# Altium PCB altium-nano-debug.PcbDoc
Units mm, origin at the board's own origin, x right, y up, seen from the top; angles counter-clockwise.
Board outline 39.64 x 60.08 mm, 2 copper layers (Top Layer, Bottom Layer), stack 1.505 mm thick; 53 components, 50 nets, 209 pads, 56 vias.
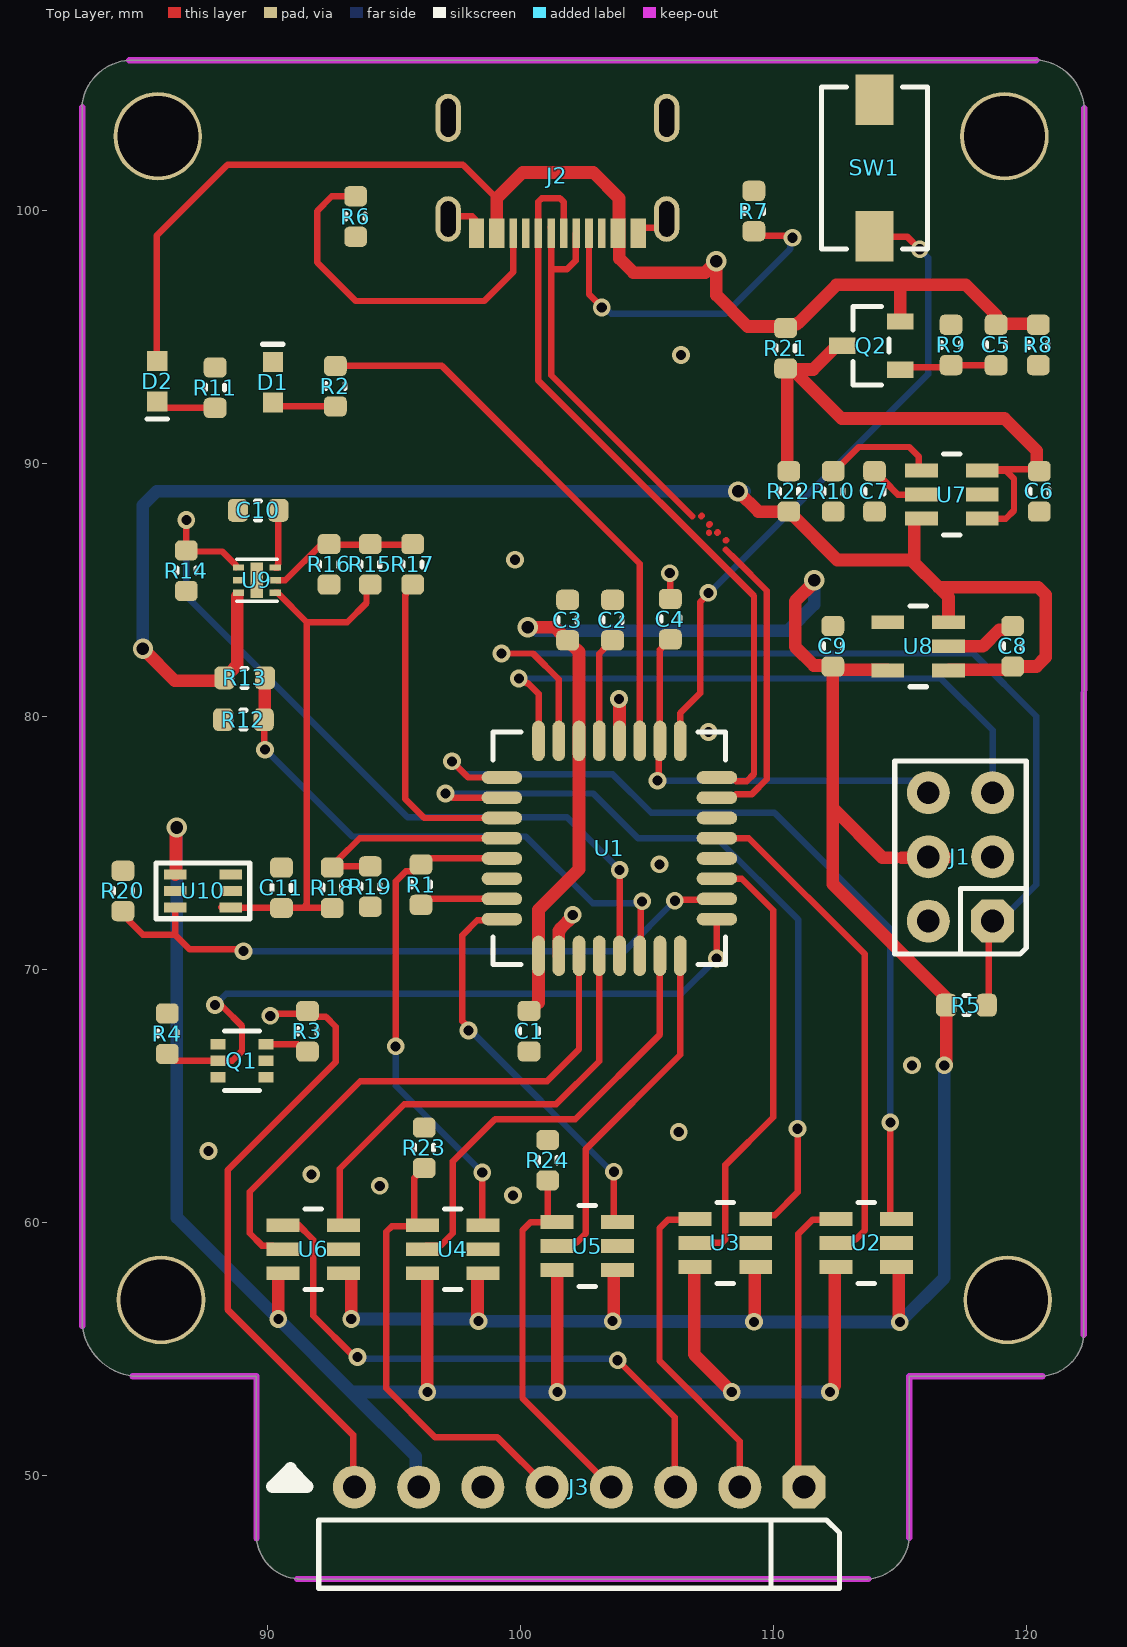
[diagram p0: Top Layer view]
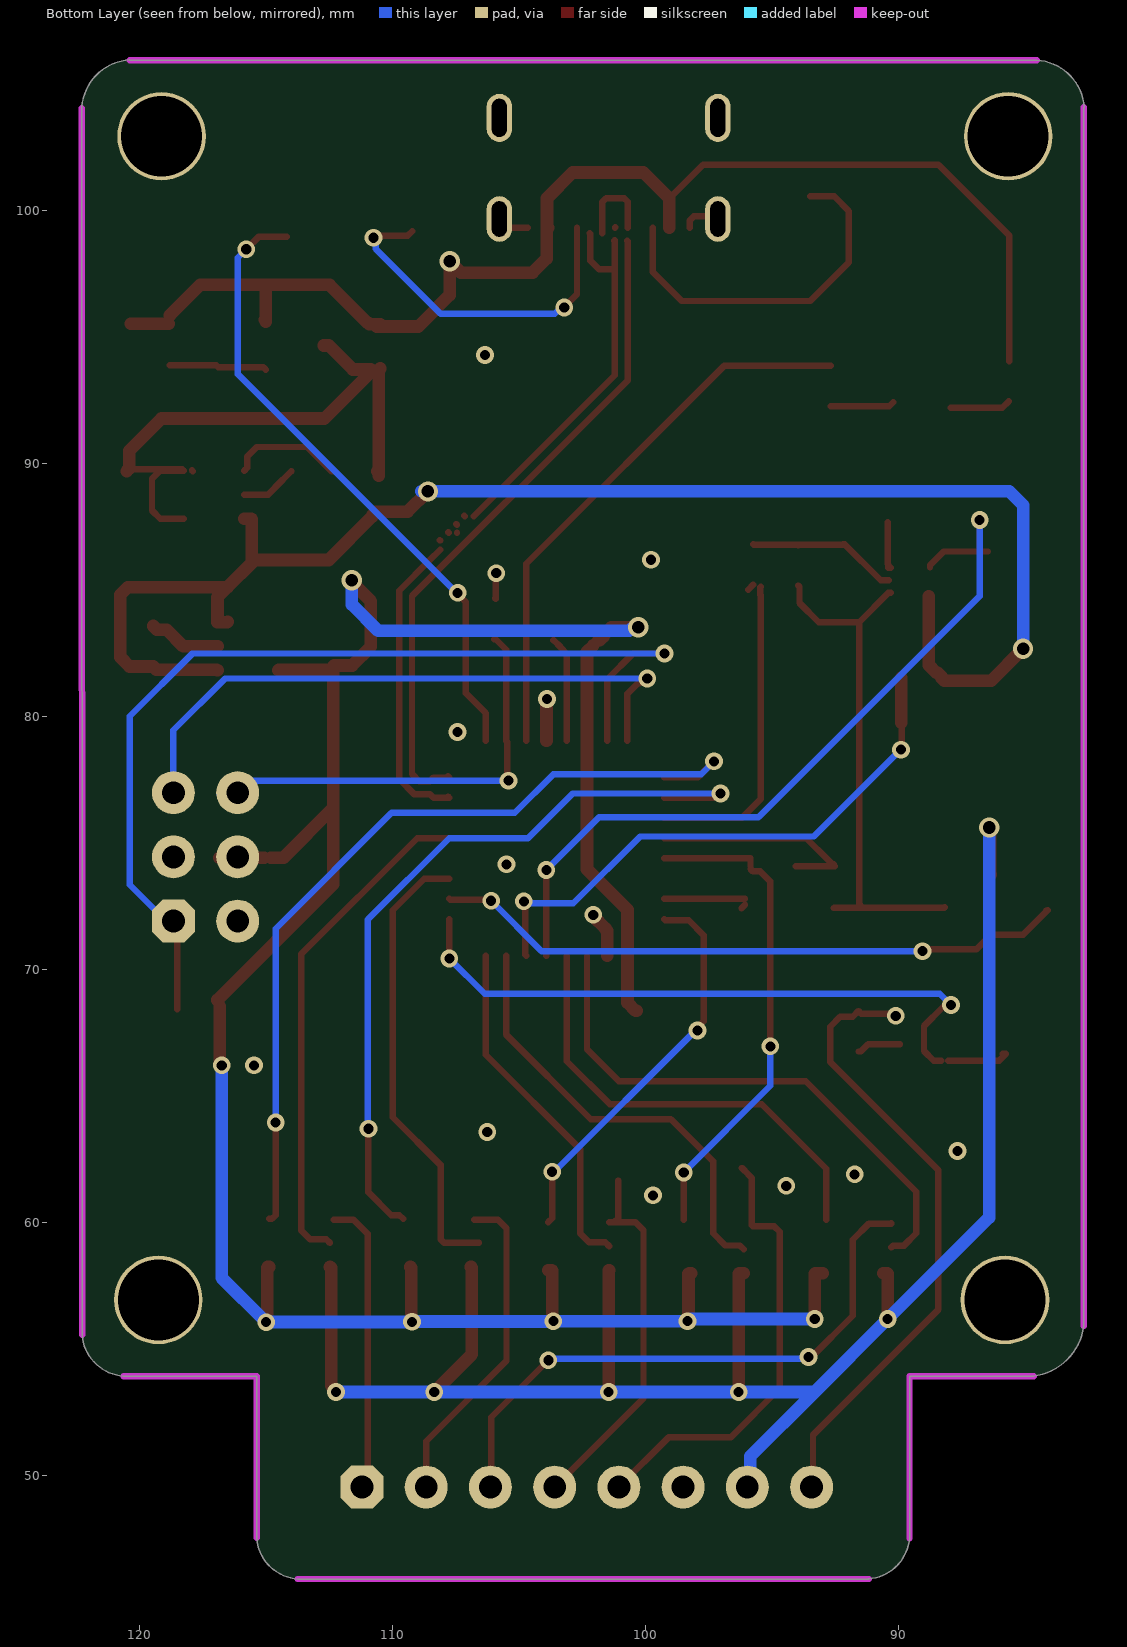
[diagram p1: Bottom Layer view, seen from below]

## Layer stack, top to bottom
Top Solder: solder mask 0.0102, Solder Resist, Dk 3.5
Top Layer: signal copper 0.0356
Dielectric 1: prepreg 0.1168, PP-016, Dk 4.4
Dielectric 2: dielectric 1.2, FR-4, Dk 4.8
Dielectric 3: prepreg 0.1168, PP-016, Dk 4.4
Bottom Layer: signal copper 0.0356
Bottom Solder: solder mask 0.0102, Solder Resist, Dk 3.5

## Board outline
84.645,53.922 89.55,53.922 89.55,47.512 ccw(c91.291,47.652) 91.167,45.909 91.166,45.896 113.738,45.896 ccw(c113.612,47.652) 115.368,47.527 115.368,53.922 120.635,53.922 ccw(c120.509,55.678) 122.265,55.552 122.265,59.314 122.281,102.703 122.281,104.066 122.284,103.957 ccw(c120.259,103.957) 120.385,105.978 120.384,105.963 84.52,105.963 ccw(c84.645,103.957) 82.64,104.108 82.663,104.106 82.663,102.703 82.663,59.055 82.663,55.904 ccw(c84.917,56.182)

## Components (designator, comment, footprint, x,y, rotation, side; value= is the part's Value field where it differs from the comment)
C1 "" CAP_C_0603 100.33,67.564 r90 top
C2 "" CAP_C_0603 103.632,83.82 r270 top
C3 "" CAP_C_0603 101.854,83.82 r270 top
C4 "" CAP_C_0603 105.918,83.858 r270 top
C5 "" CAP_C_0603 118.797,94.701 r270 top
C6 "" CAP_C_0603 120.509,88.909 r270 top
C7 "" CAP_C_0603 113.989,88.909 r270 top
C8 "" CAP_C_0603 119.456,82.783 r90 top
C9 "" CAP_C_0603 112.344,82.783 r90 top
C10 "" CAP_C_0603 89.613,88.156 r180 top
C11 "" CAP_C_0603 90.539,73.234 r90 top
D1 "" LED_0603_Yellow 90.198,93.229 r90 top
D2 "" LED_0603_GREEN 85.626,93.267 r270 top
J1 "" HDR_M_2.54_2x3 117.39,74.456 r90 top
J2 "" CON_USB2.0-C_RCPT_SMD_RA_KLS_KLS1-5409 101.449,102.326 r180 top
J3 "" HDR_F_2.54_1x8_RA 102.313,49.533 r180 top
Q1 "" SOT-363 88.976,66.396 r0 top
Q2 "" SOT-23-3 113.863,94.677 r90 top
R1 "" RES_C_0603 96.056,73.359 r270 top
R2 "" RES_C_0603 92.671,93.071 r90 top
R3 "" RES_C_0603 91.567,67.558 r90 top
R4 "" RES_C_0603 86.024,67.465 r270 top
R5 "" RES_C_0603 117.625,68.594 r180 top
R6 "" RES_C_0603 93.472,99.779 r270 top
R7 "" RES_C_0603 109.22,99.995 r90 top
R8 "" RES_C_0603 120.467,94.701 r90 top
R9 "" RES_C_0603 117.019,94.701 r270 top
R10 "" RES_C_0603 112.358,88.909 r90 top
R11 "" RES_C_0603 87.912,93.013 r270 top
R12 "" RES_C_0603 89.034,79.88 r0 top
R13 "" RES_C_0603 89.083,81.532 r180 top
R14 "" RES_C_0603 86.777,85.774 r90 top
R15 "" RES_C_0603 94.05,86.024 r270 top
R16 "" RES_C_0603 92.42,86.024 r90 top
R17 "" RES_C_0603 95.725,86.024 r270 top
R18 "" RES_C_0603 92.545,73.234 r270 top
R19 "" RES_C_0603 94.05,73.281 r90 top
R20 "" RES_C_0603 84.269,73.108 r270 top
R21 "" RES_C_0603 110.474,94.572 r90 top
R22 "" RES_C_0603 110.603,88.909 r90 top
R23 "" RES_C_0603 96.182,62.951 r270 top
R24 "" RES_C_0603 101.067,62.459 r270 top
SW1 "" SW_TACT_SMD_CK_KSR231GLFS 113.989,101.699 r0 top
U1 "" TQFP-32_7x7 103.505,74.794 r0 top locked
U2 "" SOT-23-6 113.666,59.189 r90 top
U3 "" SOT-23-6 108.095,59.189 r90 top
U4 "" SOT-23-6 97.31,58.938 r90 top
U5 "" SOT-23-6 102.631,59.063 r90 top
U6 "" SOT-23-6 91.793,58.938 r90 top
U7 "" SOT-23-6 117.052,88.783 r90 top
U8 "" SOT-23-5 115.716,82.783 r90 top
U9 "" "MLF-6 1.6X1.6mm" 89.563,85.396 r0 top
U10 "" SC-70-6 87.432,73.108 r0 top

## Footprints (in the part's own frame and the unit in brackets; to place one, negate y for a bottom-side part, rotate by r counter-clockwise, add the part's x,y. Pads: shape width x height; smd on the part's side, far side on the other; paste and mask are expansions set on the pad)
CAP_C_0603 [mm] "Chip Capacitor, 2-Leads, Body 1.6x0.8mm, IPC Medium Density"
  rrect50% 0.8x0.9 smd: 1(-0.8,0) 2(0.8,0)
  silkscreen extent -0.1,-0.38 0.1,0.38
CON_USB2.0-C_RCPT_SMD_RA_KLS_KLS1-5409 [mm]
  rrect50% 1x1.9 on Top Paste: 0(-4.32,-1.355) 0(4.32,-1.355)
  rrect50% 1x1.8 on Top Paste: 0(-4.32,2.645) 0(4.32,2.645)
  oval 1x1.8 hole 0.6 slot 1.4 at 90 deg: 1(-4.32,2.645) 2(4.32,2.645)
  oval 1x1.9 hole 0.6 slot 1.5 at 90 deg: 3(-4.32,-1.355) 4(4.32,-1.355)
  rect 0.6x1.15 smd: A1/B12(-3.2,3.21) A4/B9(-2.4,3.21) B1/A12(3.2,3.21) B4/A9(2.4,3.21)
  rect 0.3x1.15 smd: A5(-1.25,3.21) A6(-0.25,3.21) A7(0.25,3.21) A8(1.25,3.21) B5(1.75,3.21) B6(0.75,3.21) B7(-0.75,3.21) B8(-1.75,3.21)
HDR_F_2.54_1x8_RA [mm] "Header Female Right Angle 8 Way 2.54mm Pitch"
  oct 1.7x1.7 hole 0.9: 1(-8.89,0)
  round 1.7 hole 0.9: 2(-6.35,0) 3(-3.81,0) 4(-1.27,0) 5(1.27,0) 6(3.81,0) 7(6.35,0) 8(8.89,0)
  silkscreen extent -10.29,1.3 10.3,4
HDR_M_2.54_2x3 [mm] "Header Male Vertical 2x3 Way 2.54mm Pitch"
  oct 1.7x1.7 hole 0.9: 1(-2.54,-1.27)
  round 1.7 hole 0.9: 2(-2.54,1.27) 3(0,-1.27) 4(0,1.27) 5(2.54,-1.27) 6(2.54,1.27)
  silkscreen extent -3.84,-2.6 3.8,2.6
LED_0603_GREEN [mm] "LED chip 0603"
  rect 0.8x0.8 smd: 1(-0.8,0) 2(0.8,0)
  silkscreen extent 1.5,-0.4 1.5,0.4
LED_0603_Yellow [mm] "LED chip 0603"
  rect 0.8x0.8 smd: 1(-0.8,0) 2(0.8,0)
  silkscreen extent 1.5,-0.4 1.5,0.4
"MLF-6 1.6X1.6mm" [mm]
  rect 0.45x0.25 smd paste-0.042 mask+0.045: 1(-0.725,0.5) 2(-0.725,0) 3(-0.725,-0.5) 4(0.725,-0.5) 5(0.725,0) 6(0.725,0.5)
  rect 0.5x1.4 smd: 7(0,0)
  silkscreen extent -0.8,-0.82 0.8,0.82
RES_C_0603 [mm] "Chip Resistor, 2-Leads, Body 1.6x0.8mm, IPC Medium Density"
  rrect50% 0.8x0.9 smd: 1(-0.8,0) 2(0.8,0)
  silkscreen extent -0.1,-0.38 0.1,0.38
SC-70-6 [mm]
  rect 0.9x0.4 smd: 1(-1.1,0.65) 2(-1.1,0) 3(-1.1,-0.65) 4(1.1,-0.65) 5(1.1,0) 6(1.1,0.65)
  silkscreen extent -1.85,-1.1 1.85,1.1
SOT-23-3 [mm]
  rect 0.65x1.05 smd: 1(-0.95,-1.15) 2(0.95,-1.15) 3(0,1.15)
  silkscreen extent -1.55,-0.7 1.55,0.72
SOT-23-5 [mm] "SOT-23-5"
  rect 0.55x1.3 smd: 1(-0.95,-1.2) 2(0,-1.2) 3(0.95,-1.2) 4(0.95,1.2) 5(-0.95,1.2)
  silkscreen extent -1.6,-0.33 1.6,0.33
SOT-23-6 [mm] "SOT-23-6"
  rect 0.55x1.3 smd: 1(-0.95,-1.2) 2(0,-1.2) 3(0.95,-1.2) 4(0.95,1.2) 5(0,1.2) 6(-0.95,1.2)
  silkscreen extent -1.6,-0.33 1.6,0.33
SOT-363 [mm]
  rect 0.6x0.42 smd mask+0.065: 1(-0.95,0.65) 2(-0.95,0) 3(-0.95,-0.65) 4(0.95,-0.65) 5(0.95,0) 6(0.95,0.65)
  silkscreen extent -0.69,-1.17 0.69,1.17
SW_TACT_SMD_CK_KSR231GLFS [mm]
  rect 1.5x2 smd: 1(0,-2.7) 2(0,2.7)
  silkscreen extent -2.1,-3.2 2.1,3.2
TQFP-32_7x7 [mm] "TQFP, 32-Leads, Body 7x7mm, Pitch 0.80mm Height 1mm"
  oval 1.6x0.5 smd: 1(-4.25,2.8) 2(-4.25,2) 3(-4.25,1.2) 4(-4.25,0.4) 5(-4.25,-0.4) 6(-4.25,-1.2) 7(-4.25,-2) 8(-4.25,-2.8) 17(4.25,-2.8) 18(4.25,-2) 19(4.25,-1.2) 20(4.25,-0.4) 21(4.25,0.4) 22(4.25,1.2) 23(4.25,2) 24(4.25,2.8)
  oval 0.5x1.6 smd: 9(-2.8,-4.25) 10(-2,-4.25) 11(-1.2,-4.25) 12(-0.4,-4.25) 13(0.4,-4.25) 14(1.2,-4.25) 15(2,-4.25) 16(2.8,-4.25) 25(2.8,4.25) 26(2,4.25) 27(1.2,4.25) 28(0.4,4.25) 29(-0.4,4.25) 30(-1.2,4.25) 31(-2,4.25) 32(-2.8,4.25)
  silkscreen extent -4.6,-4.6 4.6,4.6

## Part data
C1 C2 C3 C4 C5 C6 C7 C8 C9 C10 C11: library part CAP0455
D1: library part LED0049, "LED"
D2: library part DIODE1815, "LED"
J1: library part CON0039
J2: library part CON2580
J3: library part CON1288, "Header 1x8"
Q1: library part TRA1406, "ADC"
Q2: library part TRA0048, "Transistor MOS"
R1 R2 R3 R4 R5 R6 R7 R8 R9 R10 R11 R12 R13 R14 R15 R16 R17 R18 R19 R20 R21 R22 R23 R24: library part RES0193, "Resistor"
SW1: library part SWITCH1050, "Switch"
U1: library part IC2982, "Microcontroller"
U2 U3 U4 U5 U6: library part IC2143
U7: library part TRA1439
U8: library part MIC9419
U9: library part MIC7389, "LDO Regulator"
U10: library part MIC8764

## Free pads (board coordinates)
  round 3.5 hole 3.2: 9(85.648,102.953) 9(85.774,56.932) 9(119.13,102.953) 9(119.255,56.932)

## Via types
v1: diameter 0.7, hole 0.4, Top Layer to Bottom Layer, tented both sides, 50 vias
v2: diameter 0.8, hole 0.5, Top Layer to Bottom Layer, tented both sides, 6 vias

## Nets (pads, with @x,y where several pads share a name; then routed paths per layer and width w, separated by ;. In a path a pad name is that pad's centre, name@x,y a point inside that pad or via, vN(x,y) a via of type N, cw(c..) or ccw(c..) an arc to the next point about the centre after c; other vN are vias at no path point)
CDC_RX: J3.2 U3.4 | length 13.5
  Top Layer w0.254: U3.4@106.756,60.111 105.831,60.111 105.486,59.766 105.486,54.524 108.663,51.347 J3.2@108.663,49.031
CDC_RX_CTRL: U1.19 U3.5 | length 18.1
  Top Layer w0.254: U3.5@106.574,59.189 107.946,59.189 108.095,59.338 108.095,62.273 109.982,64.16 109.982,72.35 108.738,73.594 U1.19
CDC_TX: J3.1 U2.4 | length 12.2
  Top Layer w0.254: J3.1@111.203,49.031 110.979,49.255 110.979,59.544 111.546,60.111 U2.4@112.311,60.111
CDC_TX_CTRL: U1.21 U2.5 | length 20
  Top Layer w0.254: U1.21 109.019,75.194 113.612,70.6 113.612,59.69 113.259,59.337 112.614,59.337 U2.5
DAC: R17.2 U1.3 | length 12.8
  Top Layer w0.254: R17.2@95.429,85.133 95.447,85.116 95.447,84.82 95.429,84.803 95.429,76.745 96.18,75.994 U1.3 ; R17.2 R17.2@95.931,85.018
DBG0: J3.5 R23.2 U4.4 | length 17.8
  Top Layer w0.254: R23.2 96.171,62.151 95.904,61.883 95.904,61.873 95.788,61.757 95.788,59.888 95.754,59.854 94.906,59.854 94.677,59.625 94.677,53.435 96.615,51.497 99.079,51.497 J3.5
DBG0_CTRL: U1.15 U4.5 | length 17.7
  Top Layer w0.254: U4.5 96.258,59.086 96.831,59.086 97.31,59.565 97.31,62.411 98.984,64.084 102.159,64.084 105.505,67.43 U1.15
DBG1: J3.4 R24.2 U5.4 | length 14.7
  Top Layer w0.254: R24.2 101.067,60.161 101.215,60.013 U5.4 ; U5.4@101.141,60.013 100.392,60.013 100.069,59.69 100.069,53.047 J3.4
DBG1_CTRL: U1.16 U5.5 | length 13.9
  Top Layer w0.254: U5.5 101.579,59.211 102.224,59.211 102.577,59.565 102.577,62.902 106.305,66.63 U1.16
DBG2: J3.3 U6.4 | length 24
  Top Layer w0.254: U6.4@90.271,59.96 90.277,59.954 91.153,59.954 91.793,59.314 91.793,56.309 93.428,54.674 v1(93.548,54.674) ; v1(103.831,54.549) 106.088,52.292 J3.3@106.088,49.031
  Bottom Layer w0.254: v1(93.548,54.674) 93.611,54.612 103.768,54.612 v1(103.831,54.549)
DBG2_CTRL: U1.11 U6.5 | length 21.9
  Top Layer w0.254: U6.5@90.271,59.01 90.196,59.085 89.765,59.085 89.285,59.565 89.285,61.218 93.65,65.583 101.041,65.583 102.305,66.847 U1.11
DBG2_GPIO: U1.12 U6.3 | length 18.2
  Top Layer w0.254: U6.3@92.845,60.111 92.845,62.122 95.391,64.668 101.397,64.668 103.105,66.377 U1.12
DBG3: J3.8 R3.2 | length 25.5
  Top Layer w0.254: v1(90.094,68.167) 90.179,68.253 91.462,68.253 R3.2 91.795,68.13 92.297,68.13 92.685,67.742 92.685,66.345 88.407,62.067 88.407,56.555 93.368,51.594 J3.8@93.368,48.961
DBG3_CTRL: Q1.2 R4.2 U1.17 | length 27.9
  Top Layer w0.254: R4.2@85.738,66.665 86.007,66.396 Q1.2 ; R4.2@85.774,66.665 R4.2@85.863,66.665 ; v1(87.905,68.594) 87.991,68.508 88.235,68.508 88.976,67.767 88.976,66.78 88.591,66.396 Q1.2@88.301,66.396 ; v1(107.747,70.434) 107.747,71.986 U1.17
  Bottom Layer w0.254: v1(87.905,68.594) 88.349,69.037 106.35,69.037 v1(107.747,70.434)
GND: C1.1 C2.1 C3.1 C4.1 C6.2 C7.2 C8.2 C9.2 C10.2 C11.2 D1.2 J1.2 J2.1 J2.2 J2.3 J2.4 J2.A1/B12 J2.B1/A12 J3.6 pad.9 Q1.1 R4.1 R6.2 R7.2 R8.1 R9.1 R10.1 R11.1 R12.1 R14.1 R16.1 R19.1 R20.1 R23.1 R24.1 SW1.2 U1.10 U1.28 U2.2 U3.2 U4.2 U5.2 U6.2 U7.2 U8.2 U9.2 U9.7 U10.2 U10.5 | length 10.4
  Top Layer w0.254: J2.2@97.128,99.905 97.245,99.788 98.075,99.788 98.248,99.615 J2.B1/A12@98.248,99.34 ; J2.A1/B12@104.648,99.34 105.401,99.34 105.768,99.707 J2.1@105.768,99.905 ; v1(105.893,85.674) 105.905,85.661 105.905,84.671 C4.1 C4.1@105.943,84.683
  Top Layer w0.5: U1.10 101.505,71.534 101.574,71.603 101.574,71.624 102.057,72.107 v1(102.057,72.161) ; v1(103.886,80.696) 103.905,80.677 U1.28 ; U8.2 118.271,82.783 118.921,83.433 119.306,83.433 C8.2
  other v1: 99.691,61.07 94.425,61.446 91.719,61.9 87.655,62.825 106.248,63.576 115.471,66.211 105.489,74.159 107.428,79.394 99.771,86.208 106.339,94.301
ID_SYS: U1.22
NetC2_2: C2.2 U1.29 | length 4.2
  Top Layer w0.254: U1.29 103.105,82.493 103.354,82.742 103.354,82.753 103.622,83.02 C2.2
NetC5_2: C5.2 Q2.1 R9.2 | length 3.9
  Top Layer w0.254: Q2.1 115.1,93.814 116.882,93.814 116.969,93.901 R9.2 C5.2
NetC7_1: C7.1 U7.5 | length 2.3
  Top Layer w0.254: C7.1 113.999,89.709 114.626,89.082 114.626,89.071 114.914,88.783 U7.5
NetC10_1: C10.1 U9.6 | length 1.9
  Top Layer w0.254: U9.6 90.384,85.896 90.386,85.898 90.386,86.017 90.413,86.045 90.413,87.681
NetC11_1: C11.1 R15.2 R18.2 U9.4 U10.4 | length 20.9
  Top Layer w0.254: U10.4@88.156,72.458 88.169,72.446 91.393,72.446 ; U9.4 90.384,84.896 91.542,83.738 ; R18.2 92.533,72.446 91.393,72.446 ; R15.2@93.947,85.186 93.9,85.139 93.9,84.495 93.143,83.738 91.542,83.738 ; 91.393,72.446 91.542,72.595 91.542,83.738
NetD1_1: D1.1 R2.1 | length 2.5
  Top Layer w0.254: D1.1 90.357,92.271 R2.1
NetD2_2: D2.2 R11.2 | length 2.4
  Top Layer w0.254: D2.2 85.88,92.213 R11.2
NetJ2_A5: J2.A5 R7.1 | length 14.1
  Top Layer w0.254: J2.A5@102.698,99.34 102.698,96.709 103.204,96.203 v1(103.204,96.182) ; R7.1 109.389,99.027 110.659,99.027 v1(110.744,98.941)
  Bottom Layer w0.254: v1@103.21,96.187 103.32,96.187 103.576,95.931 108.095,95.931 110.662,98.498 110.662,98.93 v1@110.673,98.941
NetJ2_B5: J2.B5 R6.1 | length 14.4
  Top Layer w0.254: R6.1 92.532,100.579 91.948,99.995 91.948,97.963 93.472,96.439 98.552,96.439 99.698,97.585 J2.B5@99.698,99.34
NetQ1_6: Q1.6 R3.1 | length 1.8
  Top Layer w0.254: Q1.6 91.189,67.046 91.477,66.758 R3.1
NetR1_2: R1.2 U1.7 | length 3.4
  Top Layer w0.254: R1.2 R1.2@96.193,72.422 ; R1.2@96.056,72.794 U1.7
NetR2_2: R2.2 U1.27 | length 22.3
  Top Layer w0.254: R2.2 96.883,93.871 104.705,86.049 U1.27
NetR10_2: R10.2 U7.4 | length 4.5
  Top Layer w0.254: R10.2 112.408,89.709 113.364,90.664 115.368,90.664 115.744,90.288 115.744,89.841 U7.4
NetR15_1: R15.1 R16.2 R17.1 U9.5 | length 6
  Top Layer w0.254: U9.5@90.363,85.396 90.69,85.396 92.119,86.824 92.169,86.824 92.188,86.805 93.928,86.805 93.947,86.786 93.966,86.805 95.706,86.805 R17.1
NetSW1_1: SW1.1 U1.25 | length 25.5
  Top Layer w0.254: U1.25 106.305,80.143 107.092,80.93 107.092,84.524 107.418,84.85 v1(107.418,84.896) ; SW1.1@114.178,98.986 115.278,98.986 v1(115.778,98.486)
  Bottom Layer w0.254: v1(107.418,84.896) 107.468,84.896 116.12,93.548 116.12,98.143 v1(115.778,98.486)
REG_ENABLE: R14.2 U1.13 U9.1 | length 31.8
  Top Layer w0.254: R14.2@86.452,86.532 86.777,86.532 88.201,86.532 88.74,85.994 U9.1@88.74,85.898 ; R14.2 v1(86.777,87.78) ; U1.13 103.908,70.547 103.908,73.936 v1(103.911,73.939)
  Bottom Layer w0.254: v1(86.777,87.78) 86.777,84.77 95.525,76.022 101.829,76.022 v1(103.911,73.939)
S0_0_RX: R1.1 U1.5 U4.3 | length 19.5
  Top Layer w0.254: v1(95.053,66.964) 95.053,73.484 95.448,73.879 95.739,73.879 R1.1@95.838,73.978 ; R1.1@95.838,74.103 95.838,74.395 U1.5 ; U4.3@98.476,60.107 v1(98.476,61.976)
  Bottom Layer w0.254: v1(95.053,66.964) 95.053,65.399 v1(98.476,61.976)
S0_3_CLK: U1.8 U5.3 | length 15.8
  Top Layer w0.254: v1(97.937,67.591) 97.937,67.711 97.694,67.954 97.694,71.36 98.281,71.947 99.208,71.947 U1.8 ; v1(103.683,62.001) 103.683,60.161 U5.3
  Bottom Layer w0.254: v1(97.937,67.591) 98.015,67.591 103.605,62.001 v1(103.683,62.001)
S1_0_TX: U1.1 U2.3 | length 34
  Top Layer w0.254: v1(97.282,78.232) 97.92,77.594 U1.1 ; v1(114.616,63.954) 114.616,60.287 114.764,60.139 U2.3
  Bottom Layer w0.254: v1(97.282,78.232) 97.79,77.724 103.632,77.724 105.156,76.2 110.033,76.2 114.616,71.617 v1(114.616,63.954)
S1_1_RX: U1.2 U3.3 | length 30.9
  Top Layer w0.254: v1(97.028,76.962) 97.149,76.962 97.317,76.794 U1.2 ; U3.3@109.577,60.139 109.725,60.287 110.045,60.287 110.947,61.189 v1(110.947,63.703)
  Bottom Layer w0.254: v1(97.028,76.962) 102.87,76.962 104.638,75.194 107.755,75.194 110.973,71.976 110.973,63.729 v1(110.947,63.703)
SRST: C4.2 J1.6 U1.26 | length 17.5
  Top Layer w0.254: v1(105.41,77.47) 105.458,77.518 105.458,78.997 U1.26 105.505,82.645 105.64,82.78 105.64,82.791 105.908,83.058 C4.2 C4.2@105.968,83.058
  Bottom Layer w0.254: v1(105.41,77.47) 115.968,77.47 116.476,76.962 J1.6@116.84,76.962
SWCLK: J1.1 R5.1 U1.31 | length 39.8
  Top Layer w0.254: v1(99.238,82.499) 100.482,82.499 101.505,81.477 U1.31 ; R5.1@118.503,68.431 118.503,71.758 J1.1
  Bottom Layer w0.254: v1(99.238,82.499) 117.907,82.499 120.384,80.022 120.384,73.359 118.941,71.916 J1.1
SWDIO: J1.5 U1.32 | length 24.9
  Top Layer w0.254: v1(99.924,81.509) 100.044,81.509 100.231,81.322 100.288,81.322 100.705,80.905 U1.32
  Bottom Layer w0.254: v1(99.924,81.509) 116.611,81.509 118.66,79.46 J1.5
USBD_N: J2.A7 J2.B7 U1.23 | length 27.7
  Top Layer w0.254: J2.A7@101.19,99.348 J2.A7@101.198,99.34 ; J2.A7@101.199,98.847 J2.A7@101.222,98.824 ; J2.A7@101.222,98.815 101.207,98.8 101.207,97.687 ; J2.B7 102.176,99.093 102.176,98.548 102.176,98.406 102.175,98.037 101.825,97.687 101.207,97.687 ; 106.784,87.929 106.17,88.542 101.207,93.506 101.207,97.687 ; 107.143,87.929 107.156,87.942 ; 107.445,87.589 107.477,87.621 ; 107.766,87.267 107.798,87.3 ; U1.23@107.802,76.841 U1.23 108.372,76.794 108.518,76.94 109.146,76.94 109.731,77.525 109.731,84.981 108.517,86.196 108.106,86.606 ; 108.106,86.966 108.119,86.979
USBD_P: J2.A6 J2.B6 U1.24 | length 30.7
  Top Layer w0.254: J2.B6@100.714,98.815 100.699,98.8 100.699,93.295 104.244,89.75 106.731,87.262 109.223,84.77 109.223,77.735 108.936,77.448 108.518,77.448 108.372,77.594 U1.24 U1.24@107.802,77.641 ; J2.A6 101.698,100.355 101.549,100.503 100.838,100.503 100.698,100.363 ; 100.698,100.363 100.689,100.355 100.689,99.349 100.698,99.34 100.698,100.363
VBUS_ADC: R12.2 R13.1 U1.14 | length 22.7
  Top Layer w0.254: R12.2@89.859,79.854 89.859,78.72 v1(89.885,78.695) ; R12.2@89.883,79.754 R12.2@89.908,79.729 ; U1.14 104.752,70.591 104.752,72.646 v1(104.8,72.695)
  Top Layer w0.5: R12.2@89.883,79.754 R13.1
  Bottom Layer w0.254: v1@89.84,78.761 93.34,75.26 100.203,75.26 102.846,72.617 104.723,72.617 v1(104.8,72.695)
VBUS_DELAYED: C6.1 Q2.3 R21.1 R22.2 U7.1 U7.3 | length 24.5
  Top Layer w0.254: U7.3@117.895,89.711 U7.3@117.924,89.739 ; U7.1 119.183,87.833 119.506,88.156 119.506,89.41 119.183,89.733 U7.3 118.305,89.786 119.183,89.786 C6.1@120.388,89.786
  Top Layer w0.5: R21.1 R21.1@110.538,93.707 ; R22.2@110.538,89.522 R21.1@110.538,93.582 ; R22.2@110.538,89.773 R22.2 ; Q2.3 112.513,94.677 111.563,93.727 110.85,93.727 111.025,93.551 111.025,93.458 112.691,91.793 119.13,91.793 120.402,90.52 120.402,89.816 C6.1
VCC_LEVEL: J3.7 U2.6 U3.6 U4.6 U5.6 U6.6 U10.1 | length 73.5
  Top Layer w0.5: U10.1 86.366,73.792 86.366,75.582 v2(86.401,75.616) ; v1(90.413,56.179) 90.413,57.963 90.438,57.988 U6.6 ; U4.6 96.282,57.988 96.307,57.963 v1(96.307,53.295) ; U5.6 101.44,58.105 101.44,53.304 v1(101.449,53.295) ; U3.6 106.886,58.239 106.861,58.214 106.861,54.78 v1(108.346,53.295) ; v1(112.233,53.295) 112.233,53.349 112.42,53.537 112.42,58.214 112.441,58.214 U2.6
  Bottom Layer w0.5: v2(86.401,75.616) 86.401,60.192 v1(90.413,56.179) 93.298,53.295 ; J3.7@95.851,49.144 95.851,50.742 93.298,53.295 ; v1(112.233,53.295) v1(101.449,53.295) v1(96.307,53.295) 93.298,53.295
VCC_P3V3: C1.2 C3.2 C9.1 J1.4 R5.2 U1.9 U1.30 U2.1 U3.1 U4.1 U5.1 U6.1 U8.5 | length 103.1
  Top Layer w0.254: C9.1@112.344,81.858 C9.1 ; 114.808,74.422 115.062,74.422
  Top Layer w0.5: U6.1 93.273,57.988 93.298,57.963 v1(93.298,56.179) ; U4.1@98.188,57.988 98.264,57.988 98.289,57.963 98.289,56.132 v1(98.327,56.094) ; v2(100.279,83.541) 101.333,83.541 101.654,83.22 101.654,83.17 101.804,83.02 C3.2 ; C1.2 100.38,68.364 100.705,68.689 U1.9 100.705,72.365 102.305,73.965 U1.30 102.305,82.569 C3.2@102.054,82.82 ; v1(103.635,56.094) 103.674,56.132 103.674,58.088 103.699,58.113 U5.1 ; v1(109.223,56.069) 109.259,56.104 109.259,58.214 109.284,58.239 U3.1 ; v2(111.606,85.397) 111.606,85.316 110.854,84.564 110.854,82.764 111.593,82.025 112.303,82.025 C9.1 ; U8.5 114.491,81.858 112.344,81.858 112.344,76.383 ; 114.808,74.422 114.305,74.422 112.344,76.383 ; U2.1 114.929,58.239 114.954,58.214 114.954,56.092 v1(114.992,56.054) ; 115.062,74.422 116.12,74.422 J1.4@116.84,74.422 ; v1(116.747,66.211) 116.747,66.265 116.825,66.343 R5.2@116.825,68.544 ; R5.2@116.924,68.794 112.344,73.373 112.344,76.383
  Bottom Layer w0.5: v1(93.298,56.179) 98.188,56.179 98.284,56.083 v1@98.327,56.083 ; v1(98.327,56.094) v1(103.635,56.094) ; v2(100.279,83.541) 100.337,83.483 100.549,83.483 100.641,83.391 110.561,83.391 111.605,84.435 v2(111.606,85.397) ; v1@103.635,56.083 109.223,56.083 109.245,56.061 114.984,56.061 v1(114.992,56.054) 116.747,57.809 v1(116.747,66.211)
VCC_VBUS: C8.1 R13.2 R22.1 U7.6 U8.1 U8.3 U9.3 | length 61.3
  Top Layer w0.5: v2(85.057,82.684) 86.327,81.414 88.165,81.414 R13.2 88.283,81.582 88.433,81.732 88.483,81.732 88.783,82.033 88.783,84.765 ; v2(108.596,88.909) 109.396,88.109 R22.1 ; R22.1@110.653,88.109 110.803,87.959 110.803,87.909 112.516,86.195 115.448,86.195 115.556,86.087 ; U7.6 115.581,87.833 115.556,87.808 115.556,86.087 ; U8.3@116.516,83.758 116.541,83.733 U8.3 116.916,84.727 116.52,85.123 ; U8.1 116.941,81.858 119.331,81.858 C8.1 120.395,81.983 120.76,82.349 120.76,84.825 120.462,85.123 116.52,85.123 ; 115.556,86.087 116.52,85.123
  Bottom Layer w0.5: v2(85.057,82.684) 85.057,88.365 85.601,88.909 v2@108.847,88.909
VDDIN: C5.1 D2.1 J2.A4/B9 J2.B4/A9 Q2.2 R8.2 R21.2 | length 51.3
  Top Layer w0.254: D2.1@85.598,94.05 85.598,99.016 88.407,101.825 97.715,101.825 99.048,100.491 ; C5.1@118.797,95.881 C5.1 C5.1@118.841,95.545 ; R8.2@120.351,95.545 R8.2@120.396,95.59
  Top Layer w0.5: J2.B4/A9@99.048,99.34 99.048,100.491 100.076,101.519 102.87,101.519 103.886,100.503 J2.A4/B9@103.886,99.378 ; J2.A4/B9@103.848,99.34 103.899,99.29 103.899,98.121 104.458,97.561 107.287,97.561 v2(107.734,98.008) 107.734,96.668 108.973,95.429 R21.2@110.613,95.429 ; R21.2@110.474,95.522 110.916,95.522 110.967,95.572 110.983,95.572 112.486,97.076 117.602,97.076 C5.1@118.797,95.881 ; Q2.2 Q2.2@115.013,95.666 ; 115.013,97.045 Q2.2@115.013,95.666 ; Q2.2@115.044,95.697 Q2.2@115.013,95.666 ; C5.1@118.841,95.545 R8.2@120.351,95.545
VOFF: U1.20
VTG_ADC: R18.1 R19.2 U1.4 | length 8.8
  Top Layer w0.254: R18.1@92.545,74.159 92.635,74.159 92.632,74.156 R18.1@92.632,74.151 ; R19.2 92.632,74.081 92.509,74.081 92.608,74.18 92.782,74.354 92.788,74.354 93.628,75.194 U1.4
VTG_EN: R20.2 U1.18 U10.3 | length 26.3
  Top Layer w0.254: R20.2@84.084,72.352 84.397,72.039 84.397,72.035 85.058,71.374 86.331,71.374 ; R20.2@84.142,72.321 R20.2@84.152,72.321 ; U10.3 86.331,72.457 86.331,71.374 ; v1(89.034,70.726) 88.956,70.803 86.901,70.803 86.672,71.033 86.331,71.374 ; v1(106.096,72.72) 106.133,72.757 107.718,72.757 U1.18
  Bottom Layer w0.254: v1(89.034,70.726) 104.101,70.726 v1(106.096,72.72)
pads on no net: J1.3 J2.0 J2.A8 J2.B8 Q1.3 Q1.4 Q1.5 U1.6 U8.4 U10.6

## Keep-outs
Keep-Out Layer:
  lines w0.254: 82.663,55.904 82.663,59.055 82.663,102.703 82.663,104.106 ; 84.52,105.963 120.384,105.963 ; 84.645,53.922 86.877,53.922 89.55,53.922 89.55,47.512 ; 91.166,45.896 113.738,45.896 ; 115.368,47.527 115.368,53.922 118.04,53.922 120.635,53.922 ; 122.265,55.552 122.265,59.314 122.281,102.703 122.281,104.066

## Silkscreen, mask and mechanical layers (free items; w line width, h text height)
Top Overlay:
  lines w0.508: 90.79,49.784 91.12,49.784 ; 90.891,50.216 91.552,49.555 90.18,49.555 90.891,50.266